# Altium PCB proto2022_2022-10-26.pcbdoc
Units mil, origin at the board's own origin, x right, y up, seen from the top; angles counter-clockwise.
Board outline 6676.22 x 5248.9 mil, 2 copper layers (Top Layer, Bottom Layer); 36 components, 20 nets, 155 pads, 9 vias.
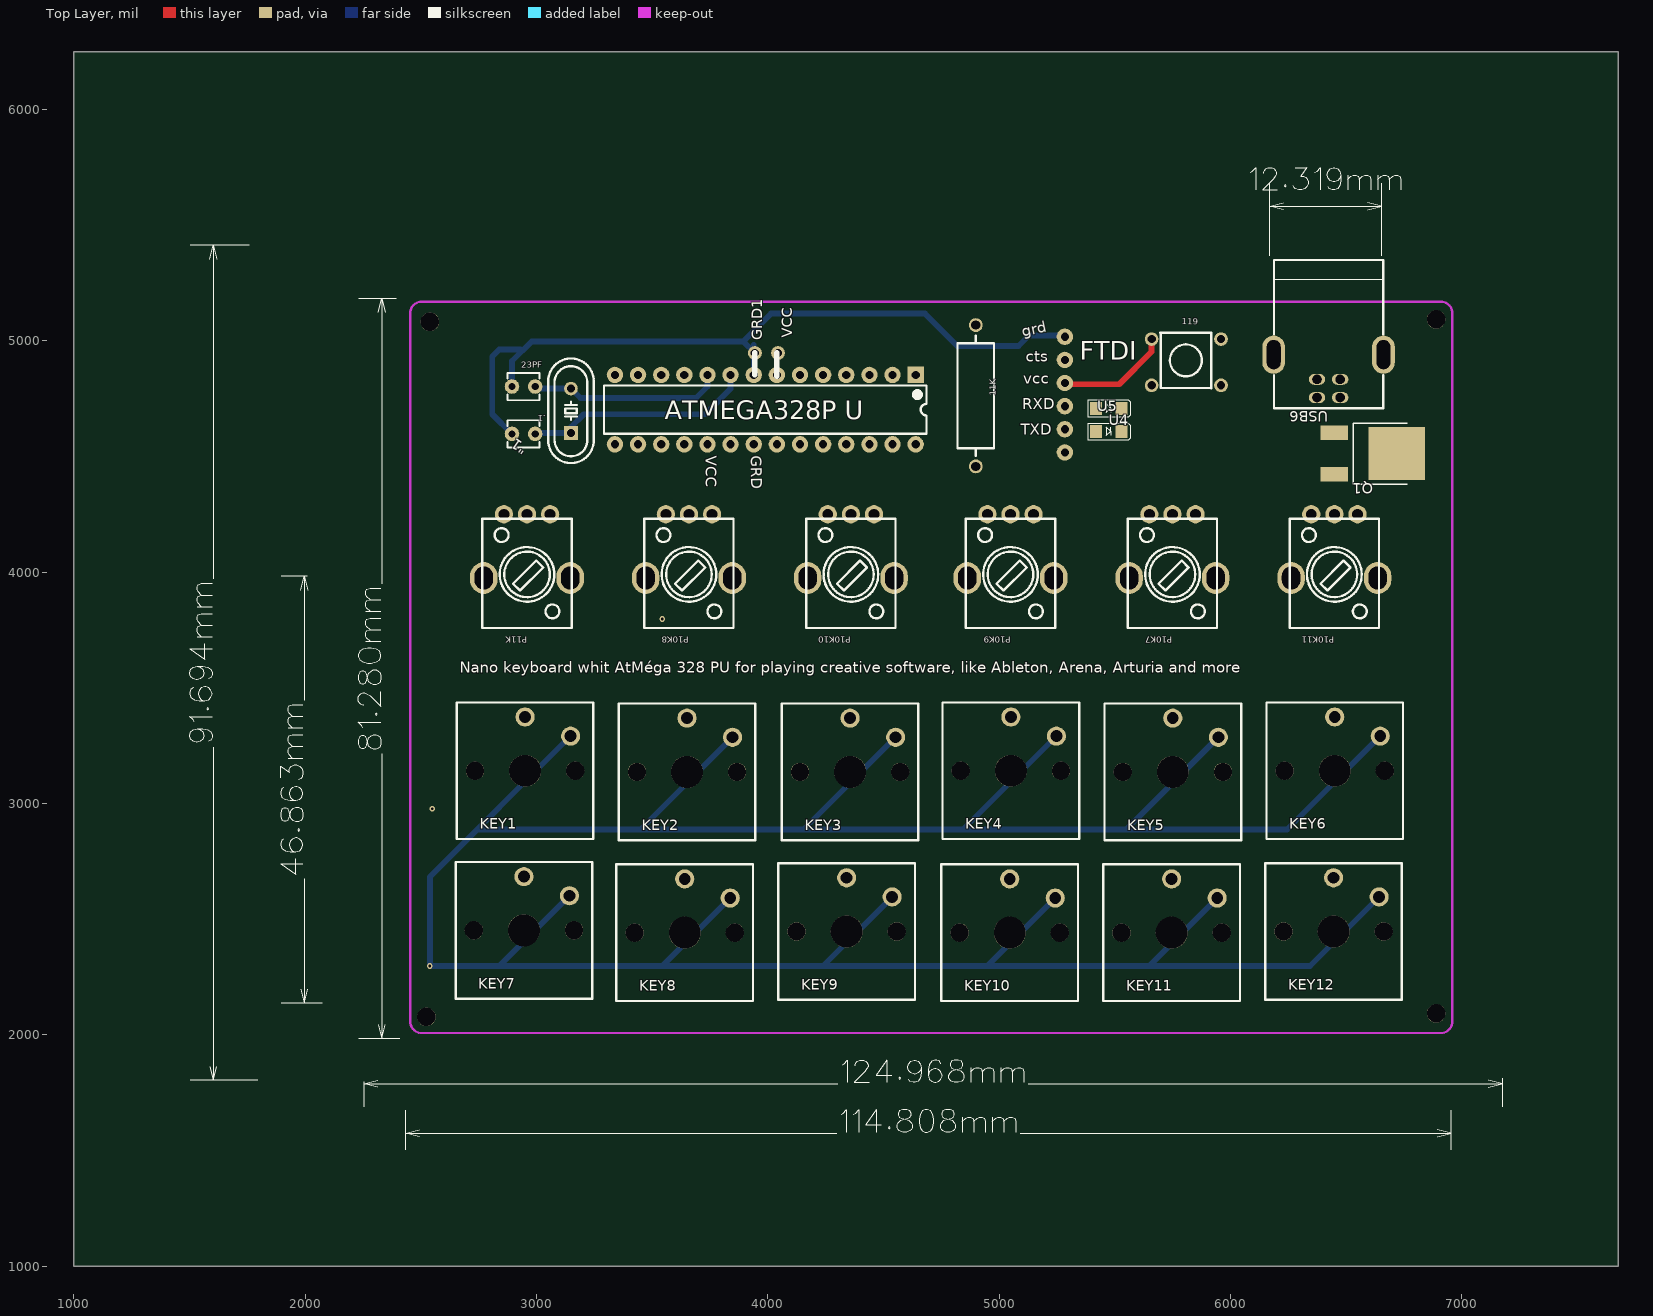
[diagram p0: Top Layer view]
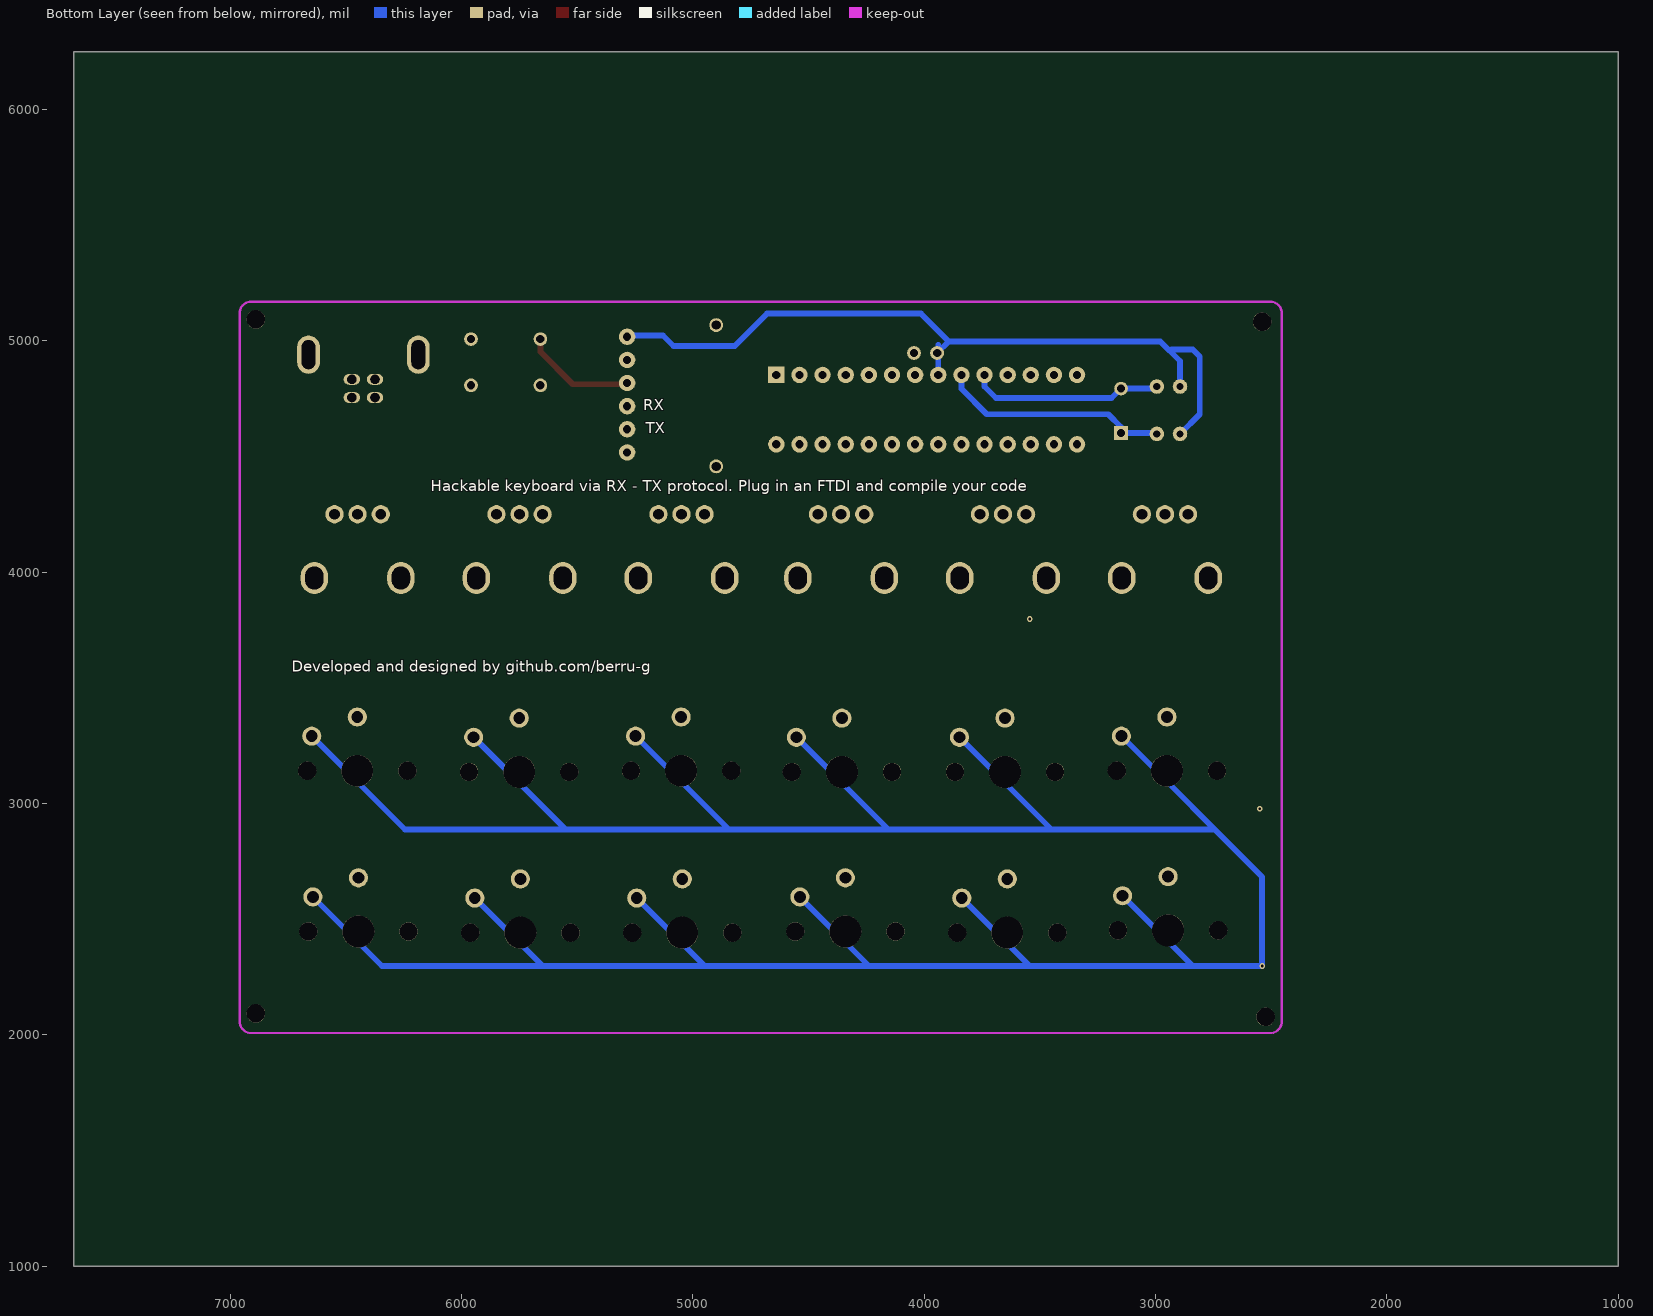
[diagram p1: Bottom Layer view, seen from below]

## Layer stack, top to bottom
Top Layer: signal copper (thickness not stored)
Dielectric: dielectric 12.6, FR-4, Dk 4.8
Bottom Layer: signal copper (thickness not stored)

## Board outline
7676.22,1000 1000,1000 1000,6248.9 7676.22,6248.9

## Components (designator, comment, footprint, x,y, rotation, side; value= is the part's Value field where it differs from the comment)
11K "RES-TH_BD4.0-L11.5-P15.50-D0.7" RES-TH_BD4.0-L11.5-P15.50-D0.7 4899.22,4762 r270 top
23PF "CAP-TH_L3.5-W3.0-P2.54-D0.8" CAP-TH_L3.5-W3.0-P2.54-D0.8 2944.22,4802 r0 top
119 "SWITCH MINI BUTON PULSER" "SWITCH MINI BUTON PULSER" 5819.22,4897 r0 top
"\"1" "CAP-TH_L3.5-W3.0-P2.54-D0.8" CAP-TH_L3.5-W3.0-P2.54-D0.8 2944.22,4597 r180 top
.1 "HC-49US_L11.5-W4.5-P4.88" HC-49US_L11.5-W4.5-P4.88 3149.22,4697 r90 top
GRD1 "ATMEGA_328PU" ATMEGA_328PU 3339.22,4552 r0 top
KEY1 "KEY-TH_CPG135001D0X" KEY-TH_CPG135001D0X 3049.22,3332 r0 top
KEY2 "KEY-TH_CPG135001D0X" KEY-TH_CPG135001D0X 3749.22,3327 r0 top
KEY3 "KEY-TH_CPG135001D0X" KEY-TH_CPG135001D0X 4454.22,3327 r0 top
KEY4 "KEY-TH_CPG135001D0X" KEY-TH_CPG135001D0X 5149.22,3332 r0 top
KEY5 "KEY-TH_CPG135001D0X" KEY-TH_CPG135001D0X 5849.22,3327 r0 top
KEY6 "KEY-TH_CPG135001D0X" KEY-TH_CPG135001D0X 6549.22,3332 r0 top
KEY7 "KEY-TH_CPG135001D0X" KEY-TH_CPG135001D0X 3044.22,2642 r0 top
KEY8 "KEY-TH_CPG135001D0X" KEY-TH_CPG135001D0X 3739.22,2632 r0 top
KEY9 "KEY-TH_CPG135001D0X" KEY-TH_CPG135001D0X 4439.22,2637 r0 top
KEY10 "KEY-TH_CPG135001D0X" KEY-TH_CPG135001D0X 5144.22,2632 r0 top
KEY11 "KEY-TH_CPG135001D0X" KEY-TH_CPG135001D0X 5844.22,2632 r0 top
KEY12 "KEY-TH_CPG135001D0X" KEY-TH_CPG135001D0X 6544.22,2637 r0 top
P10K7 "R09-5KΩ" R09-5KΩ 5749.22,4112 r180 top
P10K8 "R09-5KΩ" R09-5KΩ 3659.22,4112 r180 top
P10K9 "R09-5KΩ" R09-5KΩ 5049.22,4112 r180 top
P10K10 "R09-5KΩ" R09-5KΩ 4359.22,4112 r180 top
P10K11 "R09-5KΩ" R09-5KΩ 6449.22,4112 r180 top
P11K "R09-5KΩ" R09-5KΩ 2959.22,4112 r180 top
Q1 "TO-252-2_L6.6-W6.1-P4.57-LS9.9-BR-CW" TO-252-2_L6.6-W6.1-P4.57-LS9.9-BR-CW 6584.22,4512 r180 top
U4 "LED-3014-FD" LED-3014-FD 5474.22,4607 r0 top
U5 "LED-3014-FD" LED-3014-FD 5474.22,4707 r0 top
USB6 "USB-B-TH_FUS213-FDBXXK" USB-B-TH_FUS213-FDBXXK 6424.22,4847 r180 top
? "" ? 2319.92,3582 r0 top
? "" ? 1984.57,3059.5 r0 top
? "" ? 1648.11,3607 r0 top
? "" ? 4714.22,1788.63 r0 top
? "" ? 6411.72,5556.95 r0 top
? "" ? 4694.22,1588.4 r0 top
? "" ? 5809.22,4637 r0 top
? "" ? 6133.74,4907.52 r0 top

## Footprints (in the part's own frame and the unit in brackets; to place one, negate y for a bottom-side part, rotate by r counter-clockwise, add the part's x,y. Pads: shape width x height; smd on the part's side, far side on the other; paste and mask are expansions set on the pad)
ATMEGA_328PU [mm]
  rect 1.8x1.8 hole 0.9: 1(33.02,7.62)
  round 1.8 hole 0.9: 2(30.48,7.62) 3(27.94,7.62) 4(25.4,7.62) 5(22.86,7.62) 6(20.32,7.62) 7(17.78,7.62) 8(15.24,7.62) 9(12.7,7.62) 10(10.16,7.62) 11(7.62,7.62) 12(5.08,7.62) 13(2.54,7.62) 14(0,7.62) 15(0,0) 16(2.54,0) 17(5.08,0) 18(7.62,0) 19(10.16,0) 20(12.7,0) 21(15.24,0) 22(17.78,0) 23(20.32,0) 24(22.86,0) 25(25.4,0) 26(27.94,0) 27(30.48,0) 28(33.02,0)
  silkscreen extent -1.19,1.16 34.21,6.46
CAP-TH_L3.5-W3.0-P2.54-D0.8 [mm]
  round 1.6 hole 0.8: 1(-1.27,0) 2(1.27,0)
  silkscreen extent -1.75,-1.5 1.75,1.5
HC-49US_L11.5-W4.5-P4.88 [mm]
  rect 1.5x1.5 hole 0.9: 1(-2.438,0)
  round 1.5 hole 0.9: 2(2.438,0)
  silkscreen extent -5.74,-2.5 5.74,2.5
KEY-TH_CPG135001D0X [mm]
  round 2.1 hole 1.3: 1(-2.5,1.05) 2(2.5,-1.05)
  round 2 hole 2 unplated: ""(-8,-4.85) ""(3,-4.85)
  round 3.5 hole 3.5 unplated: ""(-2.5,-4.85)
  silkscreen extent -10,-12.35 5,2.65
LED-3014-FD [mm]
  rect 1.3x1.4 smd: 1(-1.4,0) 2(1.4,0)
  silkscreen extent -2.26,-0.96 2.34,0.94
R09-5KΩ [mm]
  round 2 hole 1.2: 1(-2.54,-3.5) 2(0,-3.5) 3(2.54,-3.5)
  oval 3x3.5 hole 2 slot 2.5 at 90 deg: 4(4.75,3.5) 5(-4.75,3.5)
  silkscreen extent -4.9,-3 4.9,9
RES-TH_BD4.0-L11.5-P15.50-D0.7 [mil]
  round 60 hole 39.37: 1(-305.12,0) 2(305.11,0)
  silkscreen extent -260,-79 260,79
"SWITCH MINI BUTON PULSER" [mil]
TO-252-2_L6.6-W6.1-P4.57-LS9.9-BR-CW [mm]
  rect 3x1.6 smd: 1(3.424,-2.29) 3(3.424,2.29)
  rect 6.2x5.8 smd: 2(-3.424,0)
  silkscreen extent -4.58,-3.35 1.38,3.35
USB-B-TH_FUS213-FDBXXK [mm]
  oval 1.8x1.2 hole 1: 1(1.27,2.355) 2(-1.27,2.355) 3(-1.27,0.355) 4(1.27,0.355)
  oval 2.5x4.2 hole 1.5 slot 3.2 at 90 deg: 5(-6.025,-2.355) 5(6.025,-2.355)
  silkscreen extent -6,-12.75 6,3.55
? [mil]
  silkscreen extent -89,-1600 89,1600

## Free pads (board coordinates)
  round 60 hole 36: 2(4044.22,4947) 3(3944.22,4947)
  round 70.87 hole 35.43: 23(5284.22,4517) 24(5284.22,4617) 25(5284.22,4717) 26(5284.22,4817) 27(5284.22,4917) 28(5284.22,5017)
  round 59.05 hole 35.98: A1(5659.22,4807) A2(5959.22,4807) B1(5659.22,5007) B2(5959.22,5007)
  round 80 hole 80 unplated: ""(2524.22,2077) ""(2539.22,5082) ""(6889.22,2092) ""(6889.22,5092)

## Via types
v1: diameter 24, hole 12, Top Layer to Bottom Layer, tented both sides, 9 vias

## Nets (pads, with @x,y where several pads share a name; then routed paths per layer and width w, separated by ;. In a path a pad name is that pad's centre, name@x,y a point inside that pad or via, vN(x,y) a via of type N, cw(c..) or ccw(c..) an arc to the next point about the centre after c; other vN are vias at no path point)
AREF: GRD1.20
RX: pad.25
  other v1: 5284.22,4717 4539.22,4852
S$1110: 11K.1 11K.2 23PF.1 23PF.2 "\"1.1" "\"1.2" .1.1 .1.2 GRD1.1 GRD1.3 GRD1.7 GRD1.8 GRD1.9 GRD1.10 GRD1.15 GRD1.21 GRD1.22 GRD1.26 KEY1.2 KEY2.2 KEY3.2 KEY4.2 KEY5.2 KEY6.2 KEY7.2 KEY8.2 KEY9.2 KEY10.2 KEY11.2 KEY12.2 P10K7.1 P10K7.3 P10K8.1 P10K8.3 P10K9.1 P10K9.3 P10K10.1 P10K10.3 P10K11.1 P10K11.3 P11K.1 P11K.3 pad.2 pad.3 pad.23 pad.26 pad.28 pad.B1 USB6.1 USB6.4 | length 28170.1
  Top Layer w25: pad.26 5289.22,4812 5519.22,4812 5659.22,4952 pad.B1
  Bottom Layer w24: GRD1.8 3939.22,4982 ; pad.3@3939.22,4927 3944.22,4932 v1(3944.22,4947)
  Bottom Layer w25: 2744.35,2887.37 3449.35,2887.37 ; 2894.21,4597 2809.22,4682 2809.22,4932 2839.22,4962 2929.5,4962 ; 23PF.1 2894.21,4912 2979.22,4997 3894.22,4997 ; 2994.21,4597 2998.21,4601 .1.1 3149.21,4627 3204.22,4682 3729.22,4682 3839.22,4792 GRD1.9 ; 23PF.2 3003.21,4793 .1.2 3190.21,4752 3689.22,4752 3739.22,4802 GRD1.10 ; KEY7.2 2838.98,2297 v1(2539.22,2297) ; KEY1.2 2539.22,2682.24 v1(2539.22,2297) ; KEY8.2 3543.98,2297 v1(2539.22,2297) ; KEY2.2 3449.35,2887.37 ; v1(3944.22,4947) 3894.22,4997 ; 4142.63,2887.37 4844.35,2887.37 ; KEY9.2 4238.98,2297 v1(2539.22,2297) ; KEY3.2 4154.35,2887.37 3449.35,2887.37 ; KEY10.2 4948.98,2297 v1(2539.22,2297) ; KEY4.2 4844.35,2887.37 ; pad.28 5279.22,5022 5129.22,5022 5084.22,4977 4819.22,4977 4679.22,5117 4014.22,5117 3894.22,4997 ; 5532.63,2887.37 6244.35,2887.37 KEY6.2 ; KEY11.2 5648.98,2297 v1(2539.22,2297) ; KEY5.2 5549.35,2887.37 4844.35,2887.37 ; KEY12.2 6343.98,2297 v1(2539.22,2297)
  other v1: 2549.22,2977 3544.22,3797 4044.22,4947
S$1229: GRD1.4 GRD1.5 KEY1.1 KEY7.1 KEY8.1 pad.A2
S$1965: GRD1.6 KEY9.1
S$1968: GRD1.11
S$1970: GRD1.12
S$2162: GRD1.28
S$2164: GRD1.27 pad.27
S$2168: GRD1.2 GRD1.25
S$2170: GRD1.23 GRD1.24 P10K7.2 P10K8.2 P10K9.2 P10K10.2 P10K11.2 P11K.2
S$2203: GRD1.13
S$2205: GRD1.14
S$2361: GRD1.16
S$2363: GRD1.17
S$2365: GRD1.18
S$27766: 
S$27770: 
TX: pad.24
  other v1: 5284.22,4617 4439.22,4852
VCC: GRD1.19
pads on no net: KEY1. KEY2. KEY2.1 KEY3. KEY3.1 KEY4. KEY4.1 KEY5. KEY5.1 KEY6. KEY6.1 KEY7. KEY8. KEY9. KEY10. KEY10.1 KEY11. KEY11.1 KEY12. KEY12.1 P10K7.4 P10K7.5 P10K8.4 P10K8.5 P10K9.4 P10K9.5 P10K10.4 P10K10.5 P10K11.4 P10K11.5 P11K.4 P11K.5 Q1.1 Q1.2 Q1.3 U4.1 U4.2 U5.1 U5.2 USB6.2 USB6.3 USB6.5

## Keep-outs
Keep-Out Layer:
  lines w10: 2454.22,2057 ccw(c2504.22,2057) 2504.22,2007 ; 2454.22,5119 cw(c2504.22,5119) 2504.22,5169 ; 6909.22,2007 ccw(c6909.22,2057) 6959.22,2057 ; 6909.22,5169 cw(c6909.22,5119) 6959.22,5119

## Silkscreen, mask and mechanical layers (free items; w line width, h text height)
Top Overlay:
  circle w10: c5807.22,4915 r69
  lines w10: 5697.22,5035 5917.22,5035 ; 5699.22,5033 5699.22,4797 5917.22,4795 ; 5917.22,4797 5917.22,5033
  lines w24 net S$27766: 4039.22,4847 4039.22,4947
  lines w24 net S$27770: 3944.22,4852 3944.22,4947
  text "VCC" at 4106.72,5012 h45 r90
  text "grd" at 5107.52,4999.3 h80 r12
  text "FTDI" at 5349.22,4917 h80
  text "cts" at 5114.22,4892 h80
  text "vcc" at 5104.22,4797 h80
  text "RXD" at 5099.22,4687 h80
  text "TXD" at 5094.22,4577 h80
  text "VCC" at 3714.22,4502 h80 r270
  text "GRD" at 3909.22,4502 h80 r271
  text "Nano keyboard whit AtMéga 328 PU for playing creative software, like Ableton, Arena, Arturia and more" at 2669.22,3547 h80
Bottom Overlay:
  text "RX" at 5214.22,4682 h80
  text "TX" at 5204.22,4582 h80
  text "Hackable keyboard via RX - TX protocol. Plug in an FTDI and compile your code" at 6134.22,4332 h80
  text "Developed and designed by github.com/berru-g" at 6734.22,3552 h80

## Text inside footprints (layer, text, board x,y; h text height)
GRD1: Top Overlay "ATMEGA328P U" at 3555.15,4660.74 h80